# Altium PCB mct5.PcbDoc (part 3 of 3)
Units mil, origin at the board's own origin, x right, y up, seen from the top; angles counter-clockwise.
Board outline 3925 x 3925 mil, 2 copper layers (TopLayer, BottomLayer); 78 components, 100 nets, 891 pads, 16 vias.
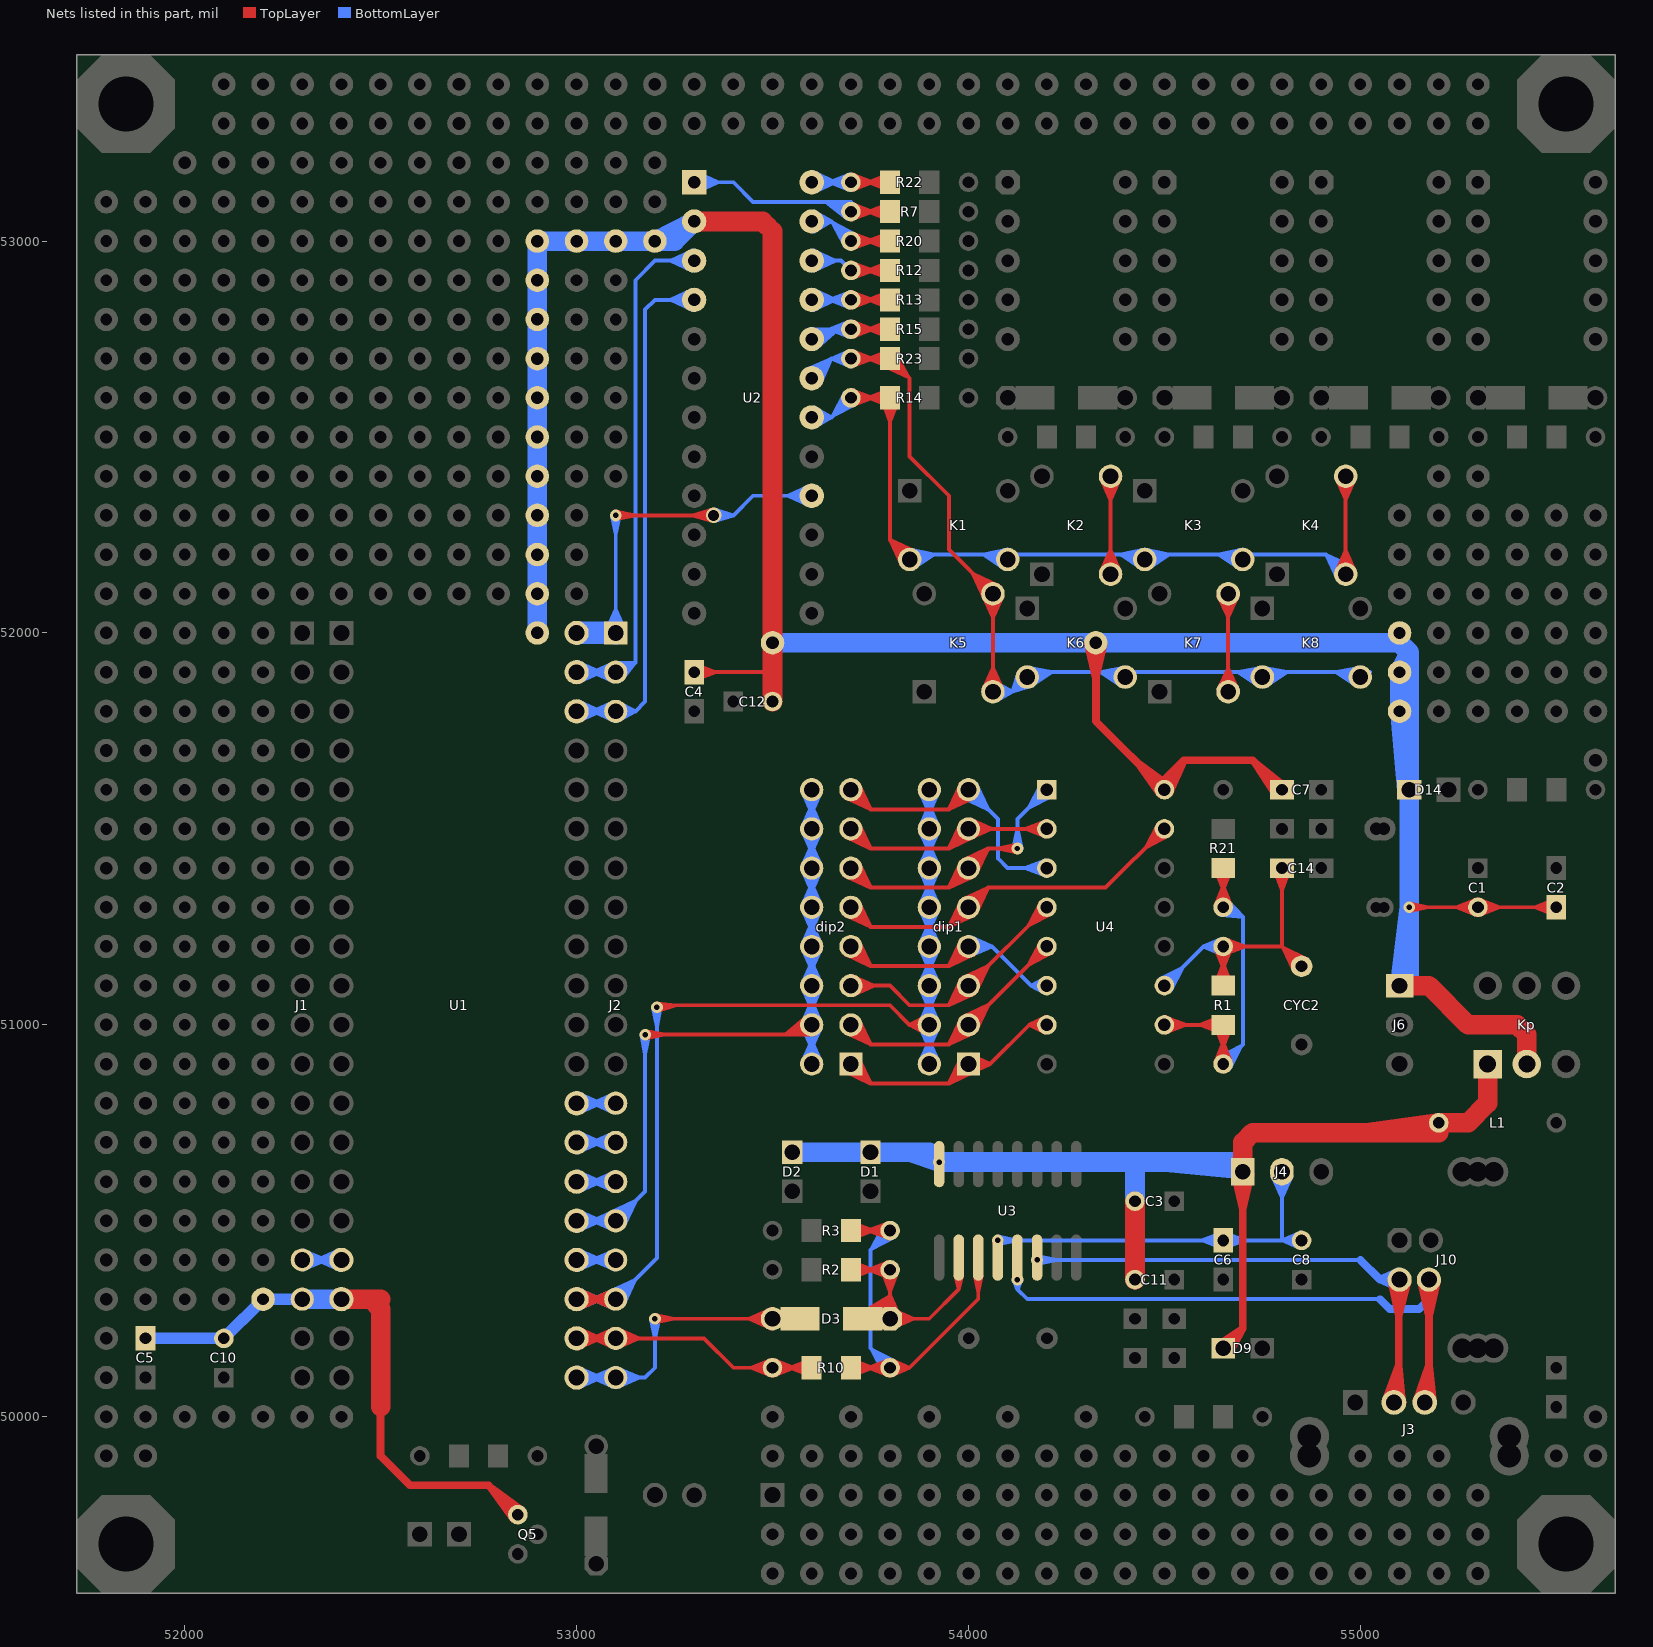
[diagram p3: the nets of this part, all layers, seen from the top]

## Via types
v1: diameter 30, hole 14, TopLayer to BottomLayer, 15 vias
v2: diameter 40, hole 28, TopLayer to BottomLayer, 1 vias

## Nets (pads, with @x,y where several pads share a name; then routed paths per layer and width w, separated by ;. In a path a pad name is that pad's centre, name@x,y a point inside that pad or via, vN(x,y) a via of type N, cw(c..) or ccw(c..) an arc to the next point about the centre after c; other vN are vias at no path point) (continued)
P26: J2.3 U1.38 U2.4 | length 2550.3
  BottomLayer w10: U1.38@53000,51800 J2.3@53100,51800 ; U1.38@53000.3,51794.01 53061,51800 ; U1.38@53000.3,51805.99 53061,51800 ; U1.38@53002.1,51784.14 53061,51800 ; U1.38@53002.1,51815.86 53061,51800 ; U1.38@53005.54,51774.6 53061,51800 ; U1.38@53005.54,51825.4 53061,51800 ; J2.3@53094.95,51776 53040.47,51800 ; J2.3@53094.95,51824 53040.47,51800 ; J2.3@53098.23,51785.58 53040.47,51800 ; J2.3@53098.23,51814.42 53040.47,51800 ; J2.3@53102.11,51785.63 53150,51800 ; J2.3@53102.11,51814.37 53150,51800 ; J2.3@53106.02,51776.22 53150,51800 ; J2.3@53106.02,51823.78 53150,51800 ; U2.4@53294.46,52824.6 53239,52850 ; U2.4@53294.46,52875.4 53239,52850 ; U2.4@53297.9,52834.14 53239,52850 ; U2.4@53297.9,52865.86 53239,52850 ; U2.4@53299.7,52844.01 53239,52850 ; U2.4@53299.7,52855.99 53239,52850 ; U2.4@53300,52850 53200,52850 53175,52825 53175,51825 53150,51800 ; 53040.47,51800 J2.3@53100,51800 ; J2.3@53100,51800 53150,51800
P27: J2.2 U1.39 U2.3 | length 2530.7
  BottomLayer w10: U1.39@53000,51900 J2.2@53100,51900 53150,51925 ; U1.39@53000.3,51894.01 53061,51900 ; U1.39@53000.3,51905.99 53061,51900 ; U1.39@53002.1,51884.14 53061,51900 ; U1.39@53002.1,51915.86 53061,51900 ; U1.39@53005.54,51874.6 53061,51900 ; U1.39@53005.54,51925.4 53061,51900 ; J2.2@53094.11,51923.81 53150,51925 ; J2.2@53094.95,51876 53040.47,51900 ; J2.2@53094.95,51924 53040.47,51900 ; J2.2@53095.25,51913.73 53150,51925 ; J2.2@53098.23,51885.58 53040.47,51900 ; J2.2@53098.23,51914.42 53040.47,51900 ; J2.2@53108.13,51887.96 53150,51925 ; J2.2@53115.51,51881 53150,51925 ; J2.2@53125,51900 53150,51925 ; U2.3@53294.46,52924.6 53239,52950 ; U2.3@53294.46,52975.4 53239,52950 ; U2.3@53297.9,52934.14 53239,52950 ; U2.3@53297.9,52965.86 53239,52950 ; U2.3@53299.7,52944.01 53239,52950 ; U2.3@53299.7,52955.99 53239,52950 ; U2.3@53300,52950 53200,52950 53150,52900 53150,51925
P32: dip1.2 dip1.4 dip1.6 dip1.8 dip1.10 dip1.12 dip1.14 dip1.16 J2.18 U1.23 | length 7735.1
  TopLayer w10: U1.23@53000,50300 J2.18@53100,50300 ; U1.23@53000.3,50294.01 53061,50300 ; U1.23@53000.3,50305.99 53061,50300 ; U1.23@53002.1,50284.14 53061,50300 ; U1.23@53002.1,50315.86 53061,50300 ; U1.23@53005.54,50274.6 53061,50300 ; U1.23@53005.54,50325.4 53061,50300 ; J2.18@53094.95,50276 53040.47,50300 ; J2.18@53094.95,50324 53040.47,50300 ; J2.18@53098.23,50285.58 53040.47,50300 ; J2.18@53098.23,50314.42 53040.47,50300 ; v1@53205,51055 53254.81,51050 ; v1@53206.99,51035.2 53254.81,51050 ; dip1.4@53893.98,50976.22 53850,51000 ; dip1.4@53893.98,51023.78 53850,51000 ; dip1.4@53897.89,50985.63 53850,51000 ; dip1.4@53897.89,51014.37 53850,51000 ; dip1.4@53900,51000 53850,51000 ; 53254.81,51050 v1(53205,51045) 53210,51050 53800,51050 53850,51000
  BottomLayer w10: U1.23@53000,50300 J2.18@53100,50300 53150,50350 ; U1.23@53000.3,50294.01 53061,50300 ; U1.23@53000.3,50305.99 53061,50300 ; U1.23@53002.1,50284.14 53061,50300 ; U1.23@53002.1,50315.86 53061,50300 ; U1.23@53005.54,50274.6 53061,50300 ; U1.23@53005.54,50325.4 53061,50300 ; J2.18@53085.93,50320.09 53150,50350 ; J2.18@53090.84,50311.27 53150,50350 ; J2.18@53094.95,50276 53040.47,50300 ; J2.18@53094.95,50324 53040.47,50300 ; J2.18@53098.23,50285.58 53040.47,50300 ; J2.18@53098.23,50314.42 53040.47,50300 ; J2.18@53111.27,50290.84 53150,50350 ; J2.18@53120.09,50285.93 53150,50350 ; v1@53195.05,51043.98 53205,50996 ; v1@53200,51050 v1(53205,51045) ; v1@53214.95,51043.98 53205,50996 ; dip1.2@53876,50905.05 53900,50959.53 ; dip1.4@53876,50994.95 53900,50940.47 ; dip1.4@53876,51005.05 53900,51059.53 ; dip1.6@53876,51094.95 53900,51040.47 ; dip1.6@53876,51105.05 53900,51159.53 ; dip1.8@53876,51194.95 53900,51140.47 ; dip1.8@53876,51205.05 53900,51259.53 ; dip1.10@53876,51294.95 53900,51240.47 ; dip1.10@53876,51305.05 53900,51359.53 ; dip1.12@53876,51394.95 53900,51340.47 ; dip1.12@53876,51405.05 53900,51459.53 ; dip1.14@53876,51494.95 53900,51440.47 ; dip1.14@53876,51505.05 53900,51559.53 ; dip1.16@53876,51594.95 53900,51540.47 ; dip1.2@53885.58,50901.77 53900,50959.53 ; dip1.4@53885.58,50998.23 53900,50940.47 ; dip1.4@53885.58,51001.77 53900,51059.53 ; dip1.6@53885.58,51098.23 53900,51040.47 ; dip1.6@53885.58,51101.77 53900,51159.53 ; dip1.8@53885.58,51198.23 53900,51140.47 ; dip1.8@53885.58,51201.77 53900,51259.53 ; dip1.10@53885.58,51298.23 53900,51240.47 ; dip1.10@53885.58,51301.77 53900,51359.53 ; dip1.12@53885.58,51398.23 53900,51340.47 ; dip1.12@53885.58,51401.77 53900,51459.53 ; dip1.14@53885.58,51498.23 53900,51440.47 ; dip1.14@53885.58,51501.77 53900,51559.53 ; dip1.16@53885.58,51598.23 53900,51540.47 ; dip1.2@53900,50900 dip1.4@53900,51000 dip1.6@53900,51100 dip1.8@53900,51200 dip1.10@53900,51300 dip1.12@53900,51400 dip1.14@53900,51500 dip1.16@53900,51600 ; dip1.2@53914.42,50901.77 53900,50959.53 ; dip1.4@53914.42,50998.23 53900,50940.47 ; dip1.4@53914.42,51001.77 53900,51059.53 ; dip1.6@53914.42,51098.23 53900,51040.47 ; dip1.6@53914.42,51101.77 53900,51159.53 ; dip1.8@53914.42,51198.23 53900,51140.47 ; dip1.8@53914.42,51201.77 53900,51259.53 ; dip1.10@53914.42,51298.23 53900,51240.47 ; dip1.10@53914.42,51301.77 53900,51359.53 ; dip1.12@53914.42,51398.23 53900,51340.47 ; dip1.12@53914.42,51401.77 53900,51459.53 ; dip1.14@53914.42,51498.23 53900,51440.47 ; dip1.14@53914.42,51501.77 53900,51559.53 ; dip1.16@53914.42,51598.23 53900,51540.47 ; dip1.2@53924,50905.05 53900,50959.53 ; dip1.4@53924,50994.95 53900,50940.47 ; dip1.4@53924,51005.05 53900,51059.53 ; dip1.6@53924,51094.95 53900,51040.47 ; dip1.6@53924,51105.05 53900,51159.53 ; dip1.8@53924,51194.95 53900,51140.47 ; dip1.8@53924,51205.05 53900,51259.53 ; dip1.10@53924,51294.95 53900,51240.47 ; dip1.10@53924,51305.05 53900,51359.53 ; dip1.12@53924,51394.95 53900,51340.47 ; dip1.12@53924,51405.05 53900,51459.53 ; dip1.14@53924,51494.95 53900,51440.47 ; dip1.14@53924,51505.05 53900,51559.53 ; dip1.16@53924,51594.95 53900,51540.47 ; 53150,50350 53205,50405 v1(53205,51045) ; 53205,50996 v1(53205,51045)
P33: J2.17 U1.24 | length 704.1
  BottomLayer w10: U1.24@53000,50400 J2.17@53100,50400 ; U1.24@53000.3,50394.01 53061,50400 ; U1.24@53000.3,50405.99 53061,50400 ; U1.24@53002.1,50384.14 53061,50400 ; U1.24@53002.1,50415.86 53061,50400 ; U1.24@53005.54,50374.6 53061,50400 ; U1.24@53005.54,50425.4 53061,50400 ; J2.17@53094.95,50376 53040.47,50400 ; J2.17@53094.95,50424 53040.47,50400 ; J2.17@53098.23,50385.58 53040.47,50400 ; J2.17@53098.23,50414.42 53040.47,50400
P34: dip2.2 dip2.4 dip2.6 dip2.8 dip2.10 dip2.12 dip2.14 dip2.16 J2.16 U1.25 | length 6512.1
  TopLayer w10: v1(53175,50975) dip2.4@53600,50975 ; v1@53176.02,50965.05 53224,50975 v1@53176.02,50984.95 ; dip2.4@53587.7,51021.22 53532.41,50975 ; dip2.4@53593.61,51013.05 53532.41,50975 ; dip2.4@53600,51000 53532.41,50975 ; dip2.4@53603.64,50985.94 53532.41,50975 ; dip2.4@53604.47,50975.88 53532.41,50975
  BottomLayer w10: U1.25@53000,50500 J2.16@53100,50500 53175,50575 v1(53175,50975) ; U1.25@53000.3,50494.01 53061,50500 ; U1.25@53000.3,50505.99 53061,50500 ; U1.25@53002.1,50484.14 53061,50500 ; U1.25@53002.1,50515.86 53061,50500 ; U1.25@53005.54,50474.6 53061,50500 ; U1.25@53005.54,50525.4 53061,50500 ; J2.16@53085.88,50520.05 53150.74,50550.74 ; J2.16@53090.82,50511.26 53150.74,50550.74 ; J2.16@53094.95,50476 53040.47,50500 ; J2.16@53094.95,50524 53040.47,50500 ; J2.16@53098.23,50485.58 53040.47,50500 ; J2.16@53098.23,50514.42 53040.47,50500 ; J2.16@53111.26,50490.82 53150.74,50550.74 ; J2.16@53120.05,50485.88 53150.74,50550.74 ; v1@53165.05,50973.98 53175,50926 v1@53184.95,50973.98 ; dip2.2@53576,50905.05 53600,50959.53 ; dip2.4@53576,50994.95 53600,50940.47 ; dip2.4@53576,51005.05 53600,51059.53 ; dip2.6@53576,51094.95 53600,51040.47 ; dip2.6@53576,51105.05 53600,51159.53 ; dip2.8@53576,51194.95 53600,51140.47 ; dip2.8@53576,51205.05 53600,51259.53 ; dip2.10@53576,51294.95 53600,51240.47 ; dip2.10@53576,51305.05 53600,51359.53 ; dip2.12@53576,51394.95 53600,51340.47 ; dip2.12@53576,51405.05 53600,51459.53 ; dip2.14@53576,51494.95 53600,51440.47 ; dip2.14@53576,51505.05 53600,51559.53 ; dip2.16@53576,51594.95 53600,51540.47 ; dip2.2@53585.58,50901.77 53600,50959.53 ; dip2.4@53585.58,50998.23 53600,50940.47 ; dip2.4@53585.58,51001.77 53600,51059.53 ; dip2.6@53585.58,51098.23 53600,51040.47 ; dip2.6@53585.58,51101.77 53600,51159.53 ; dip2.8@53585.58,51198.23 53600,51140.47 ; dip2.8@53585.58,51201.77 53600,51259.53 ; dip2.10@53585.58,51298.23 53600,51240.47 ; dip2.10@53585.58,51301.77 53600,51359.53 ; dip2.12@53585.58,51398.23 53600,51340.47 ; dip2.12@53585.58,51401.77 53600,51459.53 ; dip2.14@53585.58,51498.23 53600,51440.47 ; dip2.14@53585.58,51501.77 53600,51559.53 ; dip2.16@53585.58,51598.23 53600,51540.47 ; dip2.2@53600,50900 dip2.4@53600,51000 dip2.6@53600,51100 dip2.8@53600,51200 dip2.10@53600,51300 dip2.12@53600,51400 dip2.14@53600,51500 dip2.16@53600,51600 ; dip2.2@53614.42,50901.77 53600,50959.53 ; dip2.4@53614.42,50998.23 53600,50940.47 ; dip2.4@53614.42,51001.77 53600,51059.53 ; dip2.6@53614.42,51098.23 53600,51040.47 ; dip2.6@53614.42,51101.77 53600,51159.53 ; dip2.8@53614.42,51198.23 53600,51140.47 ; dip2.8@53614.42,51201.77 53600,51259.53 ; dip2.10@53614.42,51298.23 53600,51240.47 ; dip2.10@53614.42,51301.77 53600,51359.53 ; dip2.12@53614.42,51398.23 53600,51340.47 ; dip2.12@53614.42,51401.77 53600,51459.53 ; dip2.14@53614.42,51498.23 53600,51440.47 ; dip2.14@53614.42,51501.77 53600,51559.53 ; dip2.16@53614.42,51598.23 53600,51540.47 ; dip2.2@53624,50905.05 53600,50959.53 ; dip2.4@53624,50994.95 53600,50940.47 ; dip2.4@53624,51005.05 53600,51059.53 ; dip2.6@53624,51094.95 53600,51040.47 ; dip2.6@53624,51105.05 53600,51159.53 ; dip2.8@53624,51194.95 53600,51140.47 ; dip2.8@53624,51205.05 53600,51259.53 ; dip2.10@53624,51294.95 53600,51240.47 ; dip2.10@53624,51305.05 53600,51359.53 ; dip2.12@53624,51394.95 53600,51340.47 ; dip2.12@53624,51405.05 53600,51459.53 ; dip2.14@53624,51494.95 53600,51440.47 ; dip2.14@53624,51505.05 53600,51559.53 ; dip2.16@53624,51594.95 53600,51540.47
P35: J2.15 U1.26 | length 704.1
  BottomLayer w10: U1.26@53000,50600 J2.15@53100,50600 ; U1.26@53000.3,50594.01 53061,50600 ; U1.26@53000.3,50605.99 53061,50600 ; U1.26@53002.1,50584.14 53061,50600 ; U1.26@53002.1,50615.86 53061,50600 ; U1.26@53005.54,50574.6 53061,50600 ; U1.26@53005.54,50625.4 53061,50600 ; J2.15@53094.95,50576 53040.47,50600 ; J2.15@53094.95,50624 53040.47,50600 ; J2.15@53098.23,50585.58 53040.47,50600 ; J2.15@53098.23,50614.42 53040.47,50600
P36: J2.14 U1.27 | length 704.1
  BottomLayer w10: U1.27@53000,50700 J2.14@53100,50700 ; U1.27@53000.3,50694.01 53061,50700 ; U1.27@53000.3,50705.99 53061,50700 ; U1.27@53002.1,50684.14 53061,50700 ; U1.27@53002.1,50715.86 53061,50700 ; U1.27@53005.54,50674.6 53061,50700 ; U1.27@53005.54,50725.4 53061,50700 ; J2.14@53094.95,50676 53040.47,50700 ; J2.14@53094.95,50724 53040.47,50700 ; J2.14@53098.23,50685.58 53040.47,50700 ; J2.14@53098.23,50714.42 53040.47,50700
P37: J2.13 U1.28 | length 704.1
  BottomLayer w10: U1.28@53000,50800 J2.13@53100,50800 ; U1.28@53000.3,50794.01 53061,50800 ; U1.28@53000.3,50805.99 53061,50800 ; U1.28@53002.1,50784.14 53061,50800 ; U1.28@53002.1,50815.86 53061,50800 ; U1.28@53005.54,50774.6 53061,50800 ; U1.28@53005.54,50825.4 53061,50800 ; J2.13@53094.95,50776 53040.47,50800 ; J2.13@53094.95,50824 53040.47,50800 ; J2.13@53098.23,50785.58 53040.47,50800 ; J2.13@53098.23,50814.42 53040.47,50800
P45: J2.1 U1.40 U2.16 | length 2885.4
  TopLayer w10: v1(53100,52300) v2(53350,52300) 53296,52300 ; v1@53101.02,52290.05 53149,52300 v1@53101.02,52309.95 ; v2@53347.92,52285.15 53296,52300 ; v2@53347.92,52314.85 53296,52300
  BottomLayer w10: J2.1@53076,52005.05 53100,52059.53 ; J2.1@53085.58,52001.77 53100,52059.53 ; v1@53090.05,52298.98 53100,52251 v1@53109.95,52298.98 ; J2.1@53100,52000 v1(53100,52300) ; J2.1@53114.42,52001.77 53100,52059.53 ; J2.1@53124,52005.05 53100,52059.53 ; v2(53350,52300) 53400,52300 ; v2@53352.25,52285.17 53400,52300 ; v2@53352.25,52314.83 53400,52300 ; U2.16@53594.46,52324.6 53539,52350 ; U2.16@53594.46,52375.4 53539,52350 ; U2.16@53597.9,52334.14 53539,52350 ; U2.16@53597.9,52365.86 53539,52350 ; U2.16@53599.7,52344.01 53539,52350 ; U2.16@53599.7,52355.99 53539,52350 ; U2.16@53600,52350 53450,52350 53400,52300
  BottomLayer w20: U1.40@53000,52000 J2.1@53100,52000 ; U1.40@53002.42,51979.14 53091,52000 U1.40@53002.42,52020.86 ; J2.1@53093.92,51981.44 U1.40@53011.69,52018.68 ; J2.1@53093.92,52018.56 U1.40@53011.69,51981.32 ; J2.1@53097.87,51980.59 53010.47,52000 J2.1@53097.87,52019.41 ; J2.1@53101.95,51980.57 U1.40@53011.69,51981.32 ; J2.1@53101.95,52019.43 U1.40@53011.69,52018.68 ; U1.40@53011.69,51981.32 J2.1@53100,52000 ; U1.40@53011.69,52018.68 J2.1@53100,52000
P54: J1.17 U1.17 | length 704.1
  BottomLayer w10: J1.17@52300,50400 U1.17@52400,50400 ; J1.17@52301.77,50385.58 52359.53,50400 ; J1.17@52301.77,50414.42 52359.53,50400 ; J1.17@52305.05,50376 52359.53,50400 ; J1.17@52305.05,50424 52359.53,50400 ; U1.17@52394.46,50374.6 52339,50400 ; U1.17@52394.46,50425.4 52339,50400 ; U1.17@52397.9,50384.14 52339,50400 ; U1.17@52397.9,50415.86 52339,50400 ; U1.17@52399.7,50394.01 52339,50400 ; U1.17@52399.7,50405.99 52339,50400
Q4: dip1.1 dip2.1 U4.7 | length 1593.5
  TopLayer w10: dip2.1@53685.93,50879.91 53750,50850 ; dip2.1@53690.84,50888.73 53750,50850 ; dip2.1@53700,50900 53750,50850 ; dip2.1@53711.27,50909.16 53750,50850 ; dip2.1@53720.09,50914.07 53750,50850 ; dip1.1@53979.91,50914.07 53950,50850 ; dip1.1@53988.73,50909.16 53950,50850 ; dip1.1@54001.92,50885.6 54055,50900 ; dip1.1@54001.92,50914.4 54055,50900 ; dip1.1@54005.47,50876.09 54055,50900 ; dip1.1@54005.47,50923.91 54055,50900 ; dip1.1@54009.16,50888.73 53950,50850 ; dip1.1@54014.07,50879.91 53950,50850 ; U4.7@54195.56,50980.5 54155,51000 ; U4.7@54195.56,51019.5 54155,51000 ; U4.7@54198.89,50990.06 54155,51000 ; U4.7@54198.89,51009.94 54155,51000 ; 53750,50850 53950,50850 ; 53950,50850 dip1.1@54000,50900 54055,50900 ; 54055,50900 54155,51000 ; 54155,51000 U4.7@54200,51000 54155,51000
Q5: dip1.3 dip2.3 U4.5 | length 1803.8
  TopLayer w10: dip2.3@53685.93,50979.91 53750,50950 ; dip2.3@53690.84,50988.73 53750,50950 ; dip2.3@53700,51000 53750,50950 ; dip2.3@53711.27,51009.16 53750,50950 ; dip2.3@53720.09,51014.07 53750,50950 ; dip1.3@53979.91,51014.07 53950,50950 ; dip1.3@53985.88,51020.05 54050.74,51050.74 ; dip1.3@53988.73,51009.16 53950,50950 ; dip1.3@53990.82,51011.26 54050.74,51050.74 ; dip1.3@54009.16,50988.73 53950,50950 ; dip1.3@54011.26,50990.82 54050.74,51050.74 ; dip1.3@54014.07,50979.91 53950,50950 ; dip1.3@54020.05,50985.88 54050.74,51050.74 ; U4.5@54183.86,51211.81 54153.79,51153.79 ; U4.5@54192.41,51206.51 54153.79,51153.79 ; U4.5@54206.51,51192.41 54153.79,51153.79 ; U4.5@54211.81,51183.86 54153.79,51153.79 ; 53750,50950 53950,50950 ; 53950,50950 dip1.3@54000,51000 U4.5@54200,51200 54153.79,51153.79
Q6: dip1.5 dip2.5 U4.4 | length 1764.4
  TopLayer w10: dip2.5@53700,51100 53800,51100 53850,51050 53950,51050 ; dip2.5@53701.77,51085.58 53759.53,51100 ; dip2.5@53701.77,51114.42 53759.53,51100 ; dip2.5@53705.05,51076 53759.53,51100 ; dip2.5@53705.05,51124 53759.53,51100 ; dip1.5@53979.91,51114.07 53950,51050 ; dip1.5@53985.88,51120.05 54050.74,51150.74 ; dip1.5@53988.73,51109.16 53950,51050 ; dip1.5@53990.82,51111.26 54050.74,51150.74 ; dip1.5@54009.16,51088.73 53950,51050 ; dip1.5@54011.26,51090.82 54050.74,51150.74 ; dip1.5@54014.07,51079.91 53950,51050 ; dip1.5@54020.05,51085.88 54050.74,51150.74 ; U4.4@54183.86,51311.81 54153.79,51253.79 ; U4.4@54192.41,51306.51 54153.79,51253.79 ; U4.4@54200,51300 dip1.5@54000,51100 ; U4.4@54206.51,51292.41 54153.79,51253.79 ; U4.4@54211.81,51283.86 54153.79,51253.79 ; 53950,51050 dip1.5@54000,51100 ; 53950,51050 dip1.5@54000,51100
Q7: dip1.7 dip2.7 U4.6 | length 1617.3
  TopLayer w10: dip2.7@53685.93,51179.91 53750,51150 ; dip2.7@53690.84,51188.73 53750,51150 ; dip2.7@53700,51200 53750,51150 ; dip2.7@53711.27,51209.16 53750,51150 ; dip2.7@53720.09,51214.07 53750,51150 ; dip1.7@53979.91,51214.07 53950,51150 ; dip1.7@53988.73,51209.16 53950,51150 ; dip1.7@54009.16,51188.73 53950,51150 ; dip1.7@54014.07,51179.91 53950,51150 ; 53750,51150 53950,51150 ; 53950,51150 dip1.7@54000,51200 53950,51150
  BottomLayer w10: dip1.7@54000,51200 54060,51200 54160,51100 ; dip1.7@54001.77,51185.58 54059.53,51200 ; dip1.7@54001.77,51214.42 54059.53,51200 ; dip1.7@54005.05,51176 54059.53,51200 ; dip1.7@54005.05,51224 54059.53,51200 ; U4.6@54195,51080.64 54160,51100 ; U4.6@54195,51119.36 54160,51100 ; U4.6@54198.75,51090.08 54160,51100 ; U4.6@54198.75,51109.92 54160,51100 ; U4.6@54200,51100 54160,51100
Q10: dip1.9 dip2.9 U4.15 | length 2104.9
  TopLayer w10: dip2.9@53685.93,51279.91 53750,51250 ; dip2.9@53690.84,51288.73 53750,51250 ; dip2.9@53700,51300 53750,51250 ; dip2.9@53711.27,51309.16 53750,51250 ; dip2.9@53720.09,51314.07 53750,51250 ; dip1.9@53979.91,51314.07 53950,51250 ; dip1.9@53985.93,51320.09 54050,51350 ; dip1.9@53988.73,51309.16 53950,51250 ; dip1.9@53990.84,51311.27 54050,51350 ; dip1.9@54009.16,51288.73 53950,51250 ; dip1.9@54011.27,51290.84 54050,51350 ; dip1.9@54014.07,51279.91 53950,51250 ; dip1.9@54020.09,51285.93 54050,51350 ; U4.15@54483.86,51511.81 54453.79,51453.79 ; U4.15@54492.41,51506.51 54453.79,51453.79 ; U4.15@54500,51500 54350,51350 54050,51350 ; U4.15@54506.51,51492.41 54453.79,51453.79 ; U4.15@54511.81,51483.86 54453.79,51453.79 ; 53750,51250 53950,51250 ; 53950,51250 dip1.9@54000,51300 ; 53950,51250 dip1.9@54000,51300 ; dip1.9@54000,51300 54050,51350
Q12: dip1.11 dip2.11 U4.1 | length 2044.9
  TopLayer w10: dip2.11@53685.93,51379.91 53750,51350 ; dip2.11@53690.84,51388.73 53750,51350 ; dip2.11@53700,51400 53750,51350 ; dip2.11@53711.27,51409.16 53750,51350 ; dip2.11@53720.09,51414.07 53750,51350 ; dip1.11@53979.91,51414.07 53950,51350 ; dip1.11@53985.93,51420.09 54050,51450 ; dip1.11@53988.73,51409.16 53950,51350 ; dip1.11@53990.84,51411.27 54050,51450 ; dip1.11@54009.16,51388.73 53950,51350 ; dip1.11@54011.27,51390.84 54050,51450 ; dip1.11@54014.07,51379.91 53950,51350 ; dip1.11@54020.09,51385.93 54050,51450 ; v1@54123.98,51440.05 54076,51450 v1@54123.98,51459.95 ; v1(54125,51450) 54050,51450 ; 53750,51350 53950,51350 ; 53950,51350 dip1.11@54000,51400 ; 53950,51350 dip1.11@54000,51400 ; dip1.11@54000,51400 54050,51450
  BottomLayer w10: v1@54115.05,51451.02 54125,51499 v1@54134.95,51451.02 ; v1(54125,51450) 54125,51525 U4.1@54200,51600 ; U4.1@54183.86,51611.81 54153.79,51553.79 ; U4.1@54192.41,51606.51 54153.79,51553.79 ; U4.1@54206.51,51592.41 54153.79,51553.79 ; U4.1@54211.81,51583.86 54153.79,51553.79
Q13: dip1.13 dip2.13 U4.2 | length 1635.9
  TopLayer w10: dip2.13@53685.93,51479.91 53750,51450 ; dip2.13@53690.84,51488.73 53750,51450 ; dip2.13@53700,51500 53750,51450 ; dip2.13@53711.27,51509.16 53750,51450 ; dip2.13@53720.09,51514.07 53750,51450 ; dip1.13@53979.91,51514.07 53950,51450 ; dip1.13@53988.73,51509.16 53950,51450 ; dip1.13@54001.77,51485.58 54059.53,51500 ; dip1.13@54001.77,51514.42 54059.53,51500 ; dip1.13@54005.05,51476 54059.53,51500 ; dip1.13@54005.05,51524 54059.53,51500 ; dip1.13@54009.16,51488.73 53950,51450 ; dip1.13@54014.07,51479.91 53950,51450 ; U4.2@54196.36,51480.33 54145,51500 ; U4.2@54196.36,51519.67 54145,51500 ; U4.2@54199.09,51490.04 54145,51500 ; U4.2@54199.09,51509.96 54145,51500 ; U4.2@54200,51500 dip1.13@54000,51500 ; 53750,51450 53950,51450 ; 53950,51450 dip1.13@54000,51500 ; 53950,51450 dip1.13@54000,51500
Q14: dip1.15 dip2.15 U4.3 | length 1755.6
  TopLayer w10: dip2.15@53685.93,51579.91 53750,51550 ; dip2.15@53690.84,51588.73 53750,51550 ; dip2.15@53700,51600 53750,51550 ; dip2.15@53711.27,51609.16 53750,51550 ; dip2.15@53720.09,51614.07 53750,51550 ; dip1.15@53979.91,51614.07 53950,51550 ; dip1.15@53988.73,51609.16 53950,51550 ; dip1.15@54000,51600 53950,51550 ; dip1.15@54009.16,51588.73 53950,51550 ; dip1.15@54014.07,51579.91 53950,51550 ; 53750,51550 53950,51550
  BottomLayer w10: dip1.15@53985.88,51579.95 54050.74,51549.26 ; dip1.15@53990.82,51588.74 54050.74,51549.26 ; dip1.15@54000,51600 54075,51525 54075,51425 54100,51400 U4.3@54200,51400 ; dip1.15@54011.26,51609.18 54050.74,51549.26 ; dip1.15@54020.05,51614.12 54050.74,51549.26 ; U4.3@54196.36,51380.33 54145,51400 ; U4.3@54196.36,51419.67 54145,51400 ; U4.3@54199.09,51390.04 54145,51400 ; U4.3@54199.09,51409.96 54145,51400
RX: D3.1 D3.3 R2.1 R2.3 U3.2 | length 2134.2
  TopLayer w10: R2.3@53700,50375 R2.1@53800,50375 D3.1@53800,50250 53900,50250 53975,50325 ; R2.3@53701.01,50364.46 53755.59,50375 ; R2.3@53701.01,50385.54 53755.59,50375 ; R2.3@53703.81,50354.77 53755.59,50375 ; R2.3@53703.81,50395.23 53755.59,50375 ; D3.3@53734.6,50268.7 53798.67,50307.02 ; D3.3@53740.34,50260.41 53798.67,50307.02 ; D3.3@53750.47,50250 53798.67,50307.02 ; D3.3@53762.43,50241.75 53798.67,50307.02 ; D3.1@53771.55,50237.46 53798.67,50307.02 ; D3.1@53775.55,50255.21 53800,50310 ; R2.1@53780.33,50371.36 53800,50320 ; D3.1@53785.12,50251.88 53800,50310 ; R2.1@53790.04,50374.09 53800,50320 ; R2.1@53796.36,50355.33 53745,50375 ; R2.1@53796.36,50394.67 53745,50375 ; R2.1@53799.09,50365.04 53745,50375 ; R2.1@53799.09,50384.96 53745,50375 ; D3.1@53801.88,50235.12 53860,50250 ; D3.1@53801.88,50264.88 53860,50250 ; D3.1@53805.21,50225.55 53860,50250 ; D3.1@53805.21,50274.45 53860,50250 ; R2.1@53809.96,50374.09 53800,50320 ; D3.1@53814.88,50251.88 53800,50310 ; R2.1@53819.67,50371.36 53800,50320 ; D3.1@53824.45,50255.21 53800,50310 ; U3.2@53966.56,50359.48 53975,50325 ; U3.2@53975,50360.5 53975,50325 ; U3.2@53975,50406 53975,50325 ; U3.2@53983.44,50359.48 53975,50325
RXD: D3.2 D3.4 J2.20 U1.21 | length 2697.6
  TopLayer w10: D3.2@53494.79,50225.55 53440,50250 ; D3.2@53494.79,50274.45 53440,50250 ; D3.2@53498.12,50235.12 53440,50250 ; D3.2@53498.12,50264.88 53440,50250 ; D3.2@53500,50250 v1(53200,50250) ; v1(53200,50250) 53249,50250 ; v1(53200,50250) 53249,50250 ; v1@53201.02,50240.05 53249,50250 ; v1@53201.02,50240.05 53249,50250 ; v1@53201.02,50240.05 53249,50250 ; v1@53201.02,50240.05 53249,50250 ; v1@53201.02,50259.95 53249,50250 ; v1@53201.02,50259.95 53249,50250 ; v1@53201.02,50259.95 53249,50250 ; v1@53201.02,50259.95 53249,50250
  BottomLayer w10: U1.21@53000,50100 J2.20@53100,50100 53175,50100 53200,50125 v1(53200,50250) ; U1.21@53000.3,50094.01 53061,50100 ; U1.21@53000.3,50105.99 53061,50100 ; U1.21@53002.1,50084.14 53061,50100 ; U1.21@53002.1,50115.86 53061,50100 ; U1.21@53005.54,50074.6 53061,50100 ; U1.21@53005.54,50125.4 53061,50100 ; J2.20@53094.95,50076 53040.47,50100 ; J2.20@53094.95,50124 53040.47,50100 ; J2.20@53098.23,50085.58 53040.47,50100 ; J2.20@53098.23,50114.42 53040.47,50100 ; J2.20@53101.77,50085.58 53159.53,50100 ; J2.20@53101.77,50114.42 53159.53,50100 ; J2.20@53105.05,50076 53159.53,50100 ; J2.20@53105.05,50124 53159.53,50100 ; v1@53190.05,50248.98 53200,50201 ; v1@53190.05,50248.98 53200,50201 ; v1@53190.05,50248.98 53200,50201 ; v1@53190.05,50248.98 53200,50201 ; 53200,50201 v1@53209.95,50248.98 ; 53200,50201 v1@53209.95,50248.98 ; 53200,50201 v1@53209.95,50248.98 ; 53200,50201 v1(53200,50250) ; 53200,50201 v1@53209.95,50248.98 ; 53200,50201 v1(53200,50250)
  other v1: 53200,50250
SEG0: K1.2 K1.3 K2.2 K2.3 K3.2 K3.3 K4.2 K4.3 R14.1 R14.3 U2.18 | length 7031.4
  TopLayer w10: R14.1@53700,52600 53775,52600 53800,52575 53800,52237.5 ; R14.1@53700.91,52590.04 53755,52600 ; R14.1@53700.91,52609.96 53755,52600 ; R14.1@53703.64,52580.33 53755,52600 ; R14.1@53703.64,52619.67 53755,52600 ; R14.3@53779.77,52592.25 53800,52540.47 ; R14.3@53789.46,52595.05 53800,52540.47 ; R14.3@53796.19,52579.77 53744.41,52600 ; R14.3@53796.19,52620.23 53744.41,52600 ; R14.3@53798.99,52589.46 53744.41,52600 ; R14.3@53798.99,52610.54 53744.41,52600 ; R14.3@53800,52596.06 53800,52540.47 ; R14.3@53800,52600 53744.41,52600 ; R14.3@53810.54,52595.05 53800,52540.47 ; R14.3@53820.23,52592.25 53800,52540.47 ; K1.2@53829.48,52173.23 53800,52237.5 ; K1.2@53838.33,52178.08 53800,52237.5 ; K1.2@53850,52187.5 53800,52237.5 ; K1.2@53859.42,52199.17 53800,52237.5 ; K1.2@53864.27,52208.02 53800,52237.5 ; K2.2@54338.05,52155.21 54362.5,52210 ; K2.3@54338.05,52394.79 54362.5,52340 ; K2.2@54347.62,52151.88 54362.5,52210 ; K2.3@54347.62,52398.12 54362.5,52340 ; K2.2@54362.5,52150 K2.3@54362.5,52400 ; K2.2@54377.38,52151.88 54362.5,52210 ; K2.3@54377.38,52398.12 54362.5,52340 ; K2.2@54386.95,52155.21 54362.5,52210 ; K2.3@54386.95,52394.79 54362.5,52340 ; K4.2@54938.05,52155.21 54962.5,52210 ; K4.3@54938.05,52394.79 54962.5,52340 ; K4.2@54947.62,52151.88 54962.5,52210 ; K4.3@54947.62,52398.12 54962.5,52340 ; K4.2@54962.5,52150 K4.3@54962.5,52400 ; K4.2@54977.38,52151.88 54962.5,52210 ; K4.3@54977.38,52398.12 54962.5,52340 ; K4.2@54986.95,52155.21 54962.5,52210 ; K4.3@54986.95,52394.79 54962.5,52340
  BottomLayer w10: U2.18@53600,52550 53650,52550 ; U2.18@53600.36,52544.01 53650,52550 ; U2.18@53600.36,52555.99 53650,52550 ; U2.18@53602.56,52534.21 53650,52550 ; U2.18@53602.56,52565.79 53650,52550 ; U2.18@53606.76,52524.89 53650,52550 ; U2.18@53606.76,52575.11 53650,52550 ; R14.1@53683.86,52611.81 53653.79,52553.79 ; R14.1@53692.41,52606.51 53653.79,52553.79 ; R14.1@53706.51,52592.41 53653.79,52553.79 ; R14.1@53711.81,52583.86 53653.79,52553.79 ; K1.2@53848.8,52202.45 53912.19,52200 ; K1.2@53850,52187.5 53912.19,52200 ; K1.2@53850,52200 54300,52200 54700,52200 54900,52200 54912.5,52200 ; K1.2@53850,52212.5 53912.19,52200 ; K1.2@53854.67,52173.25 53912.19,52200 ; K1.2@53859.66,52164.44 53912.19,52200 ; K1.3@54090.31,52164.46 54038.05,52200 ; K1.3@54095.31,52173.25 54038.05,52200 ; K1.3@54100,52187.5 54038.05,52200 ; K1.3@54100,52212.5 54038.05,52200 ; K1.3@54101.2,52202.45 54038.05,52200 ; K2.2@54338.29,52156.25 54362.5,52200 ; K2.2@54347.67,52152.25 54362.5,52200 ; K2.2@54362.5,52150 54362.5,52200 ; K2.2@54377.33,52152.25 54362.5,52200 ; K2.2@54386.71,52156.25 54362.5,52200 ; K3.2@54440.26,52164.48 54388.38,52200 ; K3.2@54445.29,52173.26 54388.38,52200 ; K3.2@54448.8,52202.45 54511.95,52200 ; K3.2@54451.21,52202.45 54388.38,52200 ; K3.2@54454.69,52173.25 54511.95,52200 ; K3.2@54459.69,52164.46 54511.95,52200 ; K3.3@54690.33,52164.44 54637.85,52200 ; K3.3@54695.32,52173.25 54637.85,52200 ; K3.3@54700,52187.5 54637.85,52200 ; K3.3@54700,52212.5 54637.85,52200 ; K3.3@54701.2,52202.45 54637.85,52200 ; K4.2@54941.98,52135.73 54912.5,52200 ; K4.2@54950.83,52140.58 54912.5,52200 ; K4.2@54962.5,52150 54912.5,52200 ; K4.2@54971.92,52161.67 54912.5,52200 ; K4.2@54976.77,52170.52 54912.5,52200 ; 53650,52550 R14.1@53700,52600 53653.79,52553.79 ; 54388.38,52200 54450,52212.5 54511.95,52200 ; 54388.38,52200 K3.2@54450,52187.5 54511.95,52200
SEG1: K5.2 K5.3 K6.2 K6.3 K7.2 K7.3 K8.2 K8.3 R23.1 R23.3 U2.19 | length 7428.1
  TopLayer w10: R23.1@53700,52700 R23.3@53800,52700 53850,52650 53850,52450 53950,52350 53950,52212.5 K5.3@54062.5,52100 ; R23.1@53700.91,52690.04 53755,52700 ; R23.1@53700.91,52709.96 53755,52700 ; R23.1@53703.64,52680.33 53755,52700 ; R23.1@53703.64,52719.67 53755,52700 ; R23.3@53788.74,52678.82 53846.8,52653.2 ; R23.3@53793.52,52687.68 53846.8,52653.2 ; R23.3@53796.19,52679.77 53744.41,52700 ; R23.3@53796.19,52720.23 53744.41,52700 ; R23.3@53798.99,52689.46 53744.41,52700 ; R23.3@53798.99,52710.54 53744.41,52700 ; R23.3@53800,52696.06 53846.8,52653.2 ; R23.3@53807.78,52703.25 53846.8,52653.2 ; R23.3@53816.19,52708.79 53846.8,52653.2 ; K5.2@54038.05,51855.21 54062.5,51910 ; K5.3@54038.05,52094.79 54062.5,52040 ; K5.3@54042.04,52085.64 54011.29,52151.21 ; K5.2@54047.62,51851.88 54062.5,51910 ; K5.3@54047.62,52098.12 54062.5,52040 ; K5.3@54050.85,52090.55 54011.29,52151.21 ; K5.2@54062.5,51850 K5.3@54062.5,52100 ; K5.3@54071.95,52111.65 54011.29,52151.21 ; K5.3@54076.86,52120.46 54011.29,52151.21 ; K5.2@54077.38,51851.88 54062.5,51910 ; K5.3@54077.38,52098.12 54062.5,52040 ; K5.2@54086.95,51855.21 54062.5,51910 ; K5.3@54086.95,52094.79 54062.5,52040 ; K7.2@54638.05,51855.21 54662.5,51910 ; K7.3@54638.05,52094.79 54662.5,52040 ; K7.2@54647.62,51851.88 54662.5,51910 ; K7.3@54647.62,52098.12 54662.5,52040 ; K7.2@54662.5,51850 K7.3@54662.5,52100 ; K7.2@54677.38,51851.88 54662.5,51910 ; K7.3@54677.38,52098.12 54662.5,52040 ; K7.2@54686.95,51855.21 54662.5,51910 ; K7.3@54686.95,52094.79 54662.5,52040 ; 54011.29,52151.21 K5.3@54062.5,52100
  BottomLayer w10: U2.19@53585.31,52671.45 53650,52700 ; U2.19@53590.04,52662.52 53650,52700 ; U2.19@53595.94,52654.42 53650,52700 ; U2.19@53600,52650 53650,52700 ; U2.19@53604.42,52645.94 53650,52700 ; U2.19@53612.52,52640.04 53650,52700 ; U2.19@53621.45,52635.31 53650,52700 ; R23.1@53696,52680.4 53650,52700 ; R23.1@53696,52719.6 53650,52700 ; R23.1@53699,52690.05 53650,52700 ; R23.1@53699,52709.95 53650,52700 ; K5.2@54062.5,51862.5 K5.2@54062.5,51850 54112.5,51850 ; K5.2@54064.75,51835.17 54112.5,51850 ; K5.2@54064.75,51864.83 54112.5,51850 ; K5.2@54068.75,51825.79 54112.5,51850 ; K5.2@54068.75,51874.21 54112.5,51850 ; K6.2@54128.65,51900.51 54112.5,51850 ; K6.2@54137.5,51900 K6.2@54150,51887.5 ; K6.2@54138,51896.5 54112.5,51850 ; K6.2@54148.8,51902.45 54211.95,51900 ; K6.2@54150,51900 54400,51900 54650,51900 54662.5,51900 ; K6.2@54150,51912.5 54211.95,51900 ; K6.2@54154.69,51873.25 54211.95,51900 ; K6.2@54159,51875.5 54112.5,51850 ; K6.2@54159.69,51864.46 54211.95,51900 ; K6.2@54163.01,51866.15 54112.5,51850 ; K6.3@54390.31,51864.46 54338.05,51900 ; K6.3@54395.31,51873.25 54338.05,51900 ; K6.3@54400,51887.5 54338.05,51900 ; K6.3@54400,51912.5 54338.05,51900 ; K6.3@54401.2,51902.45 54338.05,51900 ; K7.2@54638.29,51856.25 54662.5,51900 ; K7.2@54647.67,51852.25 54662.5,51900 ; K7.2@54662.5,51850 54662.5,51900 ; K7.2@54677.33,51852.25 54662.5,51900 ; K7.2@54686.71,51856.25 54662.5,51900 ; K8.2@54740.18,51864.51 54688.9,51900 ; K8.2@54745.25,51873.27 54688.9,51900 ; K8.2@54748.8,51902.45 54812,51900 ; K8.2@54751.22,51902.45 54688.9,51900 ; K8.2@54754.69,51873.25 54812,51900 ; K8.2@54759.69,51864.45 54812,51900 ; K8.3@54990.19,51864.5 54938.83,51900 ; K8.3@54995.25,51873.27 54938.83,51900 ; K8.3@55000,51887.5 54938.83,51900 ; K8.3@55000,51912.5 54938.83,51900 ; K8.3@55001.22,51902.45 54938.83,51900 ; K8.3@55025,51900 54662.5,51900 ; 53650,52700 R23.1@53700,52700 53650,52700 ; 54112.5,51850 K6.2@54150,51887.5 ; K6.2@54150,51887.5 54211.95,51900 ; 54688.9,51900 54750,51912.5 54812,51900 ; 54688.9,51900 K8.2@54750,51887.5 54812,51900
SEG2: R15.1 R15.3 U2.20 | length 1388.3
  TopLayer w10: R15.1@53700,52775 R15.3@53800,52775 ; R15.1@53700.91,52765.04 53755,52775 ; R15.1@53700.91,52784.96 53755,52775 ; R15.1@53703.64,52755.33 53755,52775 ; R15.1@53703.64,52794.67 53755,52775 ; R15.3@53796.19,52754.77 53744.41,52775 ; R15.3@53796.19,52795.23 53744.41,52775 ; R15.3@53798.99,52764.46 53744.41,52775 ; R15.3@53798.99,52785.54 53744.41,52775
  BottomLayer w10: U2.20@53595.39,52775.59 53665.48,52775 ; U2.20@53596.04,52765.5 53665.48,52775 ; U2.20@53598.1,52755.69 53665.48,52775 ; U2.20@53600,52775 R15.1@53700,52775 ; U2.20@53602.38,52744.49 53665.48,52775 ; U2.20@53607.38,52735.8 53665.48,52775 ; U2.20@53613.62,52727.85 53665.48,52775 ; 53625,52775 U2.20@53600,52750 53665.48,52775 ; R15.1@53696.36,52755.33 53645,52775 ; R15.1@53696.36,52794.67 53645,52775 ; R15.1@53699.09,52765.04 53645,52775 ; R15.1@53699.09,52784.96 53645,52775
SEG3: R13.1 R13.3 U2.21 | length 1228.4
  TopLayer w10: R13.1@53700,52850 R13.3@53800,52850 ; R13.1@53700.91,52840.04 53755,52850 ; R13.1@53700.91,52859.96 53755,52850 ; R13.1@53703.64,52830.33 53755,52850 ; R13.1@53703.64,52869.67 53755,52850 ; R13.3@53796.19,52829.77 53744.41,52850 ; R13.3@53796.19,52870.23 53744.41,52850 ; R13.3@53798.99,52839.46 53744.41,52850 ; R13.3@53798.99,52860.54 53744.41,52850
  BottomLayer w10: U2.21@53600,52850 R13.1@53700,52850 ; U2.21@53600.3,52844.01 53661,52850 ; U2.21@53600.3,52855.99 53661,52850 ; U2.21@53602.1,52834.14 53661,52850 ; U2.21@53602.1,52865.86 53661,52850 ; U2.21@53605.54,52824.6 53661,52850 ; U2.21@53605.54,52875.4 53661,52850 ; R13.1@53696.36,52830.33 53645,52850 ; R13.1@53696.36,52869.67 53645,52850 ; R13.1@53699.09,52840.04 53645,52850 ; R13.1@53699.09,52859.96 53645,52850
SEG4: R12.1 R12.3 U2.22 | length 1018.7
  TopLayer w10: R12.1@53700,52925 R12.3@53800,52925 ; R12.1@53700.91,52915.04 53755,52925 ; R12.1@53700.91,52934.96 53755,52925 ; R12.1@53703.64,52905.33 53755,52925 ; R12.1@53703.64,52944.67 53755,52925 ; R12.3@53796.19,52904.77 53744.41,52925 ; R12.3@53796.19,52945.23 53744.41,52925 ; R12.3@53798.99,52914.46 53744.41,52925 ; R12.3@53798.99,52935.54 53744.41,52925
  BottomLayer w10: U2.22@53600,52950 53675,52950 R12.1@53700,52925 ; U2.22@53600.3,52944.01 53661,52950 ; U2.22@53600.3,52955.99 53661,52950 ; U2.22@53602.1,52934.14 53661,52950 ; U2.22@53602.1,52965.86 53661,52950 ; U2.22@53605.54,52924.6 53661,52950 ; U2.22@53605.54,52975.4 53661,52950
SEG5: R20.1 R20.3 U2.23 | length 1289.8
  TopLayer w10: R20.1@53700,53000 R20.3@53800,53000 ; R20.1@53700.91,52990.04 53755,53000 ; R20.1@53700.91,53009.96 53755,53000 ; R20.1@53703.64,52980.33 53755,53000 ; R20.1@53703.64,53019.67 53755,53000 ; R20.3@53796.19,52979.77 53744.41,53000 ; R20.3@53796.19,53020.23 53744.41,53000 ; R20.3@53798.99,52989.46 53744.41,53000 ; R20.3@53798.99,53010.54 53744.41,53000
  BottomLayer w10: U2.23@53600,53050 53650,53050 ; U2.23@53600.36,53044.01 53650,53050 ; U2.23@53600.36,53055.99 53650,53050 ; U2.23@53602.56,53034.21 53650,53050 ; U2.23@53602.56,53065.79 53650,53050 ; U2.23@53606.76,53024.89 53650,53050 ; U2.23@53606.76,53075.11 53650,53050 ; R20.1@53683.86,52988.19 53653.79,53046.21 ; R20.1@53692.41,52993.49 53653.79,53046.21 ; R20.1@53706.51,53007.59 53653.79,53046.21 ; R20.1@53711.81,53016.14 53653.79,53046.21 ; 53650,53050 R20.1@53700,53000 53653.79,53046.21
SEG6: R22.1 R22.3 U2.24 | length 1228.4
  TopLayer w10: R22.1@53700,53150 R22.3@53800,53150 ; R22.1@53700.91,53140.04 53755,53150 ; R22.1@53700.91,53159.96 53755,53150 ; R22.1@53703.64,53130.33 53755,53150 ; R22.1@53703.64,53169.67 53755,53150 ; R22.3@53796.19,53129.77 53744.41,53150 ; R22.3@53796.19,53170.23 53744.41,53150 ; R22.3@53798.99,53139.46 53744.41,53150 ; R22.3@53798.99,53160.54 53744.41,53150
  BottomLayer w10: U2.24@53600,53150 R22.1@53700,53150 ; U2.24@53600.3,53144.01 53661,53150 ; U2.24@53600.3,53155.99 53661,53150 ; U2.24@53602.1,53134.14 53661,53150 ; U2.24@53602.1,53165.86 53661,53150 ; U2.24@53605.54,53124.6 53661,53150 ; U2.24@53605.54,53175.4 53661,53150 ; R22.1@53696.36,53130.33 53645,53150 ; R22.1@53696.36,53169.67 53645,53150 ; R22.1@53699.09,53140.04 53645,53150 ; R22.1@53699.09,53159.96 53645,53150
SEG7: R7.1 R7.3 U2.1 | length 1670.9
  TopLayer w10: R7.1@53700,53075 R7.3@53800,53075 ; R7.1@53700.91,53065.04 53755,53075 ; R7.1@53700.91,53084.96 53755,53075 ; R7.1@53703.64,53055.33 53755,53075 ; R7.1@53703.64,53094.67 53755,53075 ; R7.3@53796.19,53054.77 53744.41,53075 ; R7.3@53796.19,53095.23 53744.41,53075 ; R7.3@53798.99,53064.46 53744.41,53075 ; R7.3@53798.99,53085.54 53744.41,53075
  BottomLayer w10: U2.1@53300,53150 53400,53150 53450,53100 53700,53100 ; U2.1@53300.3,53144.01 53361,53150 ; U2.1@53300.3,53155.99 53361,53150 ; U2.1@53302.1,53134.14 53361,53150 ; U2.1@53302.1,53165.86 53361,53150 ; U2.1@53305.54,53124.6 53361,53150 ; U2.1@53305.54,53175.4 53361,53150 ; R7.1@53690.04,53057.65 53636.37,53100 ; R7.1@53695.67,53065.98 53636.37,53100 ; R7.1@53700,53075 53636.37,53100 ; R7.1@53702.97,53084.55 53636.37,53100 ; R7.1@53704.51,53094.48 53636.37,53100
TX: R3.1 R3.3 R10.1 R10.3 U3.3 | length 2733
  TopLayer w10: R10.3@53700,50125 R10.1@53800,50125 53850,50125 ; R3.3@53700,50475 R3.1@53800,50475 ; R10.3@53701.01,50114.46 53755.59,50125 ; R10.3@53701.01,50135.54 53755.59,50125 ; R3.3@53701.01,50464.46 53755.59,50475 ; R3.3@53701.01,50485.54 53755.59,50475 ; R10.3@53703.81,50104.77 53755.59,50125 ; R10.3@53703.81,50145.23 53755.59,50125 ; R3.3@53703.81,50454.77 53755.59,50475 ; R3.3@53703.81,50495.23 53755.59,50475 ; R10.1@53796.36,50105.33 53745,50125 ; R10.1@53796.36,50144.67 53745,50125 ; R3.1@53796.36,50455.33 53745,50475 ; R3.1@53796.36,50494.67 53745,50475 ; R10.1@53799.09,50115.04 53745,50125 ; R10.1@53799.09,50134.96 53745,50125 ; R3.1@53799.09,50465.04 53745,50475 ; R3.1@53799.09,50484.96 53745,50475 ; R10.1@53801,50115.05 53850,50125 ; R10.1@53801,50134.95 53850,50125 ; R10.1@53804,50105.4 53850,50125 ; R10.1@53804,50144.6 53850,50125 ; U3.3@54016.54,50359.67 54025,50317 ; U3.3@54025,50360.5 54025,50317 ; U3.3@54025,50406 54025,50300 53850,50125 ; U3.3@54033.46,50359.67 54025,50317
  BottomLayer w10: R10.1@53783.86,50113.19 53753.79,50171.21 ; R3.1@53783.86,50486.81 53753.79,50428.79 ; R10.1@53792.41,50118.49 53753.79,50171.21 ; R3.1@53792.41,50481.51 53753.79,50428.79 ; R10.1@53800,50125 53750,50175 53750,50425 R3.1@53800,50475 ; R10.1@53806.51,50132.59 53753.79,50171.21 ; R3.1@53806.51,50467.41 53753.79,50428.79 ; R10.1@53811.81,50141.14 53753.79,50171.21 ; R3.1@53811.81,50458.86 53753.79,50428.79
TXD: J2.19 R10.2 R10.4 U1.22 | length 2135.6
  TopLayer w10: U1.22@53000,50200 J2.19@53100,50200 53325,50200 53400,50125 R10.2@53500,50125 R10.4@53600,50125 ; U1.22@53000.3,50194.01 53061,50200 ; U1.22@53000.3,50205.99 53061,50200 ; U1.22@53002.1,50184.14 53061,50200 ; U1.22@53002.1,50215.86 53061,50200 ; U1.22@53005.54,50174.6 53061,50200 ; U1.22@53005.54,50225.4 53061,50200 ; J2.19@53094.95,50176 53040.47,50200 ; J2.19@53094.95,50224 53040.47,50200 ; J2.19@53098.23,50185.58 53040.47,50200 ; J2.19@53098.23,50214.42 53040.47,50200 ; J2.19@53101.77,50185.58 53159.53,50200 ; J2.19@53101.77,50214.42 53159.53,50200 ; J2.19@53105.05,50176 53159.53,50200 ; J2.19@53105.05,50224 53159.53,50200 ; R10.2@53496.36,50105.33 53445,50125 ; R10.2@53496.36,50144.67 53445,50125 ; R10.2@53499.09,50115.04 53445,50125 ; R10.2@53499.09,50134.96 53445,50125 ; R10.2@53500.91,50115.04 53555,50125 ; R10.2@53500.91,50134.96 53555,50125 ; R10.2@53503.64,50105.33 53555,50125 ; R10.2@53503.64,50144.67 53555,50125 ; R10.4@53596.19,50104.77 53544.41,50125 ; R10.4@53596.19,50145.23 53544.41,50125 ; R10.4@53598.99,50114.46 53544.41,50125 ; R10.4@53598.99,50135.54 53544.41,50125
UD+: J3.3 J10.3 U3.5 | length 2073.6
  TopLayer w20: J3.3@55143.43,50041.26 55175,50130 ; J10.3@55154.14,50347.58 55175,50259 J10.3@55195.86,50347.58 ; J3.3@55164.37,50036.42 55175,50130 ; J3.3@55175,50047.05 J10.3@55175,50350 ; J3.3@55185.87,50036.44 55175,50130
  BottomLayer w10: v1@54115.2,50348 54125,50325 ; v1(54125,50350) 54125,50325 ; v1@54134.8,50348 54125,50325 ; 55050,50300 54150,50300 54125,50325
  BottomLayer w20: 55050,50300 55075,50275 55150,50275 55175,50300 ; J10.3@55154.47,50345.59 55175,50300 ; J10.3@55175,50350 55175,50300 ; J10.3@55195.53,50345.59 55175,50300
UD-: J3.2 J10.2 U3.6 | length 2001.8
  TopLayer w20: J3.2@55064.76,50041.57 55097.87,50130.84 ; J10.2@55079.09,50348.07 55097.87,50258.94 ; J3.2@55085.63,50036.42 55097.87,50130.84 ; J3.2@55097.87,50048.66 J10.2@55097.87,50347.87 ; J10.2@55100,50350 55097.87,50258.94 ; J3.2@55107.12,50036.08 55097.87,50130.84 ; J10.2@55120.8,50347.09 55097.87,50258.94
  BottomLayer w10: v1(54175,50400) 55000,50400 ; v1@54176.02,50390.05 54224,50400 v1@54176.02,50409.95
  BottomLayer w20: 55000,50400 55050,50350 ; J10.2@55095.59,50329.47 55050,50350 ; J10.2@55095.59,50370.53 55050,50350 ; J10.2@55100,50350 55050,50350
V33: C6.1 C8.2 J4.2 U3.4 | length 2095
  TopLayer w10: U3.4@54065.06,50448.86 U3.4@54075,50406 ; v1(54075,50450) U3.4@54075,50406 ; U3.4@54084.94,50448.86 U3.4@54075,50406
  BottomLayer w10: v1(54075,50450) C6.1@54650,50450 54800,50450 ; v1@54076.02,50440.05 54124,50450 v1@54076.02,50459.95 ; C6.1@54646.36,50430.33 54595,50450 ; C6.1@54646.36,50469.67 54595,50450 ; C6.1@54649.09,50440.04 54595,50450 ; C6.1@54649.09,50459.96 54595,50450 ; C6.1@54650.91,50440.04 54705,50450 ; C6.1@54650.91,50459.96 54705,50450 ; C6.1@54653.64,50430.33 54705,50450 ; C6.1@54653.64,50469.67 54705,50450 ; J4.2@54775.55,50614.79 54800,50560 ; J4.2@54785.12,50618.12 54800,50560 ; J4.2@54800,50600 54800,50450 ; J4.2@54800,50620 54800,50560 ; J4.2@54814.88,50618.12 54800,50560 ; J4.2@54824.45,50614.79 54800,50560 ; C8.2@54846,50430.4 54800,50450 ; C8.2@54846,50469.6 54800,50450 ; C8.2@54849,50440.05 54800,50450 ; C8.2@54849,50459.95 54800,50450 ; C8.2@54850,50450 54800,50450
VCC: C1.2 C2.1 C4.1 C5.1 C7.1 C10.2 C12.2 D14.1 J1.18 J6.1 Kp.2 pad.0@52900,52000 pad.0@53200,53000 pad.0@53500,51975 pad.0@55100,52000 pad.1@54325,51975 pad.4@53100,53000 pad.5@53000,53000 pad.7@52900,53000 pad.8@52900,52900 pad.9@52200,50300 pad.9@52900,52800 pad.10@52900,52700 pad.11@52900,52600 pad.12@52900,52500 pad.13@52900,52400 pad.13@55100,51800 pad.14@52900,52300 pad.14@55100,51900 pad.15@52900,52200 pad.16@52900,52100 Q5.1 U1.18 U2.2 U4.16 | length 13133.1
  TopLayer w10: C4.1@53300,51900 53500,51900 ; C4.1@53300.91,51890.04 53355,51900 ; C4.1@53300.91,51909.96 53355,51900 ; C4.1@53303.64,51880.33 53355,51900 ; C4.1@53303.64,51919.67 53355,51900 ; v1(55125,51300) C1.2@55300,51300 C2.1@55500,51300 ; v1@55126.02,51290.05 55174,51300 v1@55126.02,51309.95 ; C1.2@55296.36,51280.33 55245,51300 ; C1.2@55296.36,51319.67 55245,51300 ; C1.2@55299.09,51290.04 55245,51300 ; C1.2@55299.09,51309.96 55245,51300 ; C1.2@55300.91,51290.04 55355,51300 ; C1.2@55300.91,51309.96 55355,51300 ; C1.2@55303.64,51280.33 55355,51300 ; C1.2@55303.64,51319.67 55355,51300 ; C2.1@55496.36,51280.33 55445,51300 ; C2.1@55496.36,51319.67 55445,51300 ; C2.1@55499.09,51290.04 55445,51300 ; C2.1@55499.09,51309.96 55445,51300
  TopLayer w20: 52500,50025 52500,49900 52575,49825 52775,49825 Q5.1@52850,49750 ; Q5.1@52838.59,49740.26 52782.57,49817.43 Q5.1@52859.74,49761.41 ; pad.1@54305.12,51972.78 54325,51885 pad.1@54344.88,51972.78 ; pad.1@54325,51975 54325,51775 U4.16@54500,51600 ; U4.16@54488.25,51609.33 54550,51675 ; U4.16@54488.59,51590.26 54432.57,51667.43 U4.16@54509.74,51611.41 ; U4.16@54513.13,51592.75 54550,51675 ; C7.1@54782.12,51590.84 54732.57,51667.43 ; C7.1@54794,51600 54732.57,51667.43 ; C7.1@54800,51600 54725,51675 54550,51675 ; C7.1@54804.22,51610.98 54732.57,51667.43 ; U4.16@54500,51600 54500,51625 54550,51675 ; U4.16@54500,51600 54550,51675
  TopLayer w50: U1.18@52400,50300 52475,50300 ; 52500,50025 52500,50275 52475,50300 ; 52500,50300 52475,50300 ; U2.2@53300,53050 53475,53050 53487.5,53037.5 ; C12.2@53500,51825 53500,51900 ; 53500,51850 53500,51900 ; 53500,53025 53500,51900 ; J6.1@55100,51100 55175,51100 ; J6.1@55105,51100 55175,51100 ; Kp.2@55424.76,50900 55425,50975 ; Kp.2@55425,50900.24 55425,50975 ; 55175,51100 55275,51000 55400,51000 55425,50975
  BottomLayer w30: C5.1@51900,50200 C10.2@52100,50200 ; C10.2@52106.36,50206.36 pad.9@52200,50300 ; pad.9@52188.64,50288.64 C10.2@52100,50200 ; J1.18@52300,50300 pad.9@52200,50300 ; C10.2@52100,50200 pad.9@52200,50300
  BottomLayer w50: J1.18@52300,50300 U1.18@52400,50300 ; pad.0@52900,52000 pad.7@52900,53000 pad.5@53000,53000 pad.4@53100,53000 ; pad.0@53500,51975 55100,51975 55125,51950 ; J6.1@55100,51100 v1@55125,51288.49 ; pad.13@55103.46,51773.94 D14.1@55119,51600 ; 55104.24,51132 v1(55125,51300) ; J6.1@55125,51100 55125,51950 ; 55125,51425 D14.1@55125,51600 ; D14.1@55125,51611.63 pad.13@55100,51800 ; pad.4@53100,53000 pad.0@53200,53000 ; pad.4@53100,53000 pad.0@53200,53000 ; pad.0@53200,53000 53250,53000 ; pad.0@53200,53000 U2.2@53300,53050 ; pad.0@53200,53000 53250,53000 ; pad.0@53200,53000 U2.2@53300,53050 ; pad.0@53200,53000 53250,53000 ; 53250,53000 U2.2@53300,53050 ; 53250,53000 U2.2@53300,53050 ; pad.13@55100,51800 55125,51950 ; pad.13@55100,51800 55125,51711.54 pad.14@55100,51900 ; pad.13@55100,51800 pad.14@55100,51900 ; pad.14@55100,51900 55125,51950
VCCU: C3.2 C11.1 D1.1 D2.1 D9.1 J4.1 Kp.1 L1.2 U3.16 | length 3965.7
  TopLayer w20: D9.1@54643.58,50187.14 54700,50225 ; D9.1@54650,50175 54700,50225 ; D9.1@54654,50175 54700,50225 ; D9.1@54666.97,50165.63 54700,50225 ; J4.1@54680.12,50617.78 54700,50530 ; J4.1@54700,50620 54700,50530 ; J4.1@54700,50625 54700,50225 ; J4.1@54719.88,50617.78 54700,50530
  TopLayer w50: C11.1@54425,50350 C3.2@54425,50550 ; J4.1@54700,50625 54700,50600 54700,50700 ; J4.1@54700,50630 54700,50700 ; 55015.56,50725 L1.2@55200,50750 55275,50750 55325,50800 ; 55200,50725 54725,50725 54700,50700 ; Kp.1@55324.76,50900 55325,50800 ; Kp.1@55325,50900 55325,50800
  BottomLayer w50: D2.1@53550,50675 D1.1@53750,50675 53850,50675 ; C3.2@54425,50550 54425,50650 ; 54502.17,50650 J4.1@54700,50630 ; J4.1@54700,50625 54675,50650 54425,50650 ; 53850,50675 53900,50675 ; 53850,50675 v1(53925,50650) ; 53900,50675 v1(53925,50650) ; 53900,50675 v1(53925,50650) ; v1(53925,50650) 54425,50650
X21: C14.1 CYC2.2 R1.2 R1.4 U4.11 | length 2400.1
  TopLayer w10: R1.4@54629.77,51103.81 54650,51155.59 ; R1.2@54630.33,51196.36 54650,51145 ; R1.4@54639.46,51101.01 54650,51155.59 ; R1.2@54640.04,51199.09 54650,51145 ; R1.4@54650,51100 R1.2@54650,51200 54800,51200 ; R1.2@54650.91,51190.04 54705,51200 ; R1.2@54650.91,51209.96 54705,51200 ; R1.2@54653.64,51180.33 54705,51200 ; R1.2@54653.64,51219.67 54705,51200 ; R1.2@54659.96,51199.09 54650,51145 ; R1.4@54660.54,51101.01 54650,51155.59 ; R1.2@54669.67,51196.36 54650,51145 ; R1.4@54670.23,51103.81 54650,51155.59 ; C14.1@54780.33,51396.36 54800,51345 ; C14.1@54790.04,51399.09 54800,51345 ; C14.1@54800,51400 54800,51200 ; C14.1@54809.96,51399.09 54800,51345 ; C14.1@54819.67,51396.36 54800,51345 ; CYC2.2@54831.72,51136.53 54801.65,51198.35 ; CYC2.2@54840.43,51141.59 54801.65,51198.35 ; CYC2.2@54858.11,51159.12 54801.65,51198.35 ; CYC2.2@54863.23,51167.8 54801.65,51198.35 ; 54800,51200 54850.07,51149.93 CYC2.2@54850.07,51149.55 54801.65,51198.35
  BottomLayer w10: U4.11@54488.19,51116.14 54546.21,51146.21 ; U4.11@54493.49,51107.59 54546.21,51146.21 ; U4.11@54500,51100 54600,51200 ; U4.11@54507.59,51093.49 54546.21,51146.21 ; U4.11@54516.14,51088.19 54546.21,51146.21 ; R1.2@54646,51180.4 54600,51200 ; R1.2@54646,51219.6 54600,51200 ; R1.2@54649,51190.05 54600,51200 ; R1.2@54649,51209.95 54600,51200 ; R1.2@54650,51200 54600,51200
X22: R1.1 R1.3 R21.2 R21.4 U4.10 | length 2729.7
  TopLayer w10: U4.10@54500,51000 R1.3@54650,51000 R1.1@54650,50900 ; U4.10@54500.91,50990.04 54555,51000 ; U4.10@54500.91,51009.96 54555,51000 ; U4.10@54503.64,50980.33 54555,51000 ; U4.10@54503.64,51019.67 54555,51000 ; R1.3@54629.77,50996.19 54650,50944.41 ; R21.4@54629.77,51396.19 54650,51344.41 ; R1.1@54630.33,50903.64 54650,50955 ; R21.2@54630.33,51303.64 54650,51355 ; R1.3@54639.46,50998.99 54650,50944.41 ; R21.4@54639.46,51398.99 54650,51344.41 ; R1.1@54640.04,50900.91 54650,50955 ; R21.2@54640.04,51300.91 54650,51355 ; R1.3@54642.25,50979.77 54590.47,51000 ; R1.3@54642.25,51020.23 54590.47,51000 ; R1.3@54645.05,50989.46 54590.47,51000 ; R1.3@54645.05,51010.54 54590.47,51000 ; R1.3@54646.06,51000 54590.47,51000 ; R21.2@54650,51300 R21.4@54650,51400 ; R1.1@54659.96,50900.91 54650,50955 ; R21.2@54659.96,51300.91 54650,51355 ; R1.3@54660.54,50998.99 54650,50944.41 ; R21.4@54660.54,51398.99 54650,51344.41 ; R1.1@54669.67,50903.64 54650,50955 ; R21.2@54669.67,51303.64 54650,51355 ; R1.3@54670.23,50996.19 54650,50944.41 ; R21.4@54670.23,51396.19 54650,51344.41
  BottomLayer w10: R1.1@54638.19,50916.14 54696.21,50946.21 ; R1.1@54643.49,50907.59 54696.21,50946.21 ; R21.2@54644.4,51280.8 54700,51275 ; R21.2@54646.35,51290.69 54700,51275 ; R1.1@54650,50900 54700,50950 54700,51275 ; R21.2@54655.25,51308.51 54700,51275 ; R1.1@54657.59,50893.49 54696.21,50946.21 ; R21.2@54662,51316 54700,51275 ; R1.1@54666.14,50888.19 54696.21,50946.21 ; 54700,51275 54675,51300 R21.2@54650,51300 54700,51275
pads on no net: J3.5 J3.6 J10.5 J10.6 Kp.3 Kp.4 Kp.5 Kp.6 U2.17 U3.9 U3.10 U3.11 U3.12 U3.13 U3.14 U3.15 U4.9 U4.13 U4.14

## Polygon pours and split planes (outlines as drawn)
VCC on TopLayer "VCC" (solid, pour order 1000): 52475,50000 52925,50000 52925,52050 52475,52050

## Keep-outs
KeepOutLayer:
  the board outline again, w2

## Other copper
TopLayer:
  text "mct5" at 55425,52375 h40
  text "oooooooooo" at 52025,49800 h50
  text "1234567890" at 52025,49700 h50
  text "oooooooooo" at 52025,49625 h50

## Silkscreen, mask and mechanical layers (free items; w line width, h text height)
TopOverlay:
  text "mct5" at 55425,52375 h40
  text "USB-P" at 55275,51700 h30
  text "scm-txd" at 53400,50775 h40
  text "scm-rxd" at 53725,50775 h40
  text "5V 3.3V GND" at 54650,50750 h30
  text "SCM-P" at 54875,50100 h30 r90
  text "gnd" at 53750,49975 h40
  text "gnd" at 54150,49975 h40
  text "2017-03-11" at 52025,49875 h40